# Altium PCB PCB_Hearth.PcbDoc
Units mm, origin at the board's own origin, x right, y up, seen from the top; angles counter-clockwise.
Board outline 70.36 x 62.48 mm, 2 copper layers (Top Layer, Bottom Layer); 15 components, 16 nets, 65 pads, 0 vias.
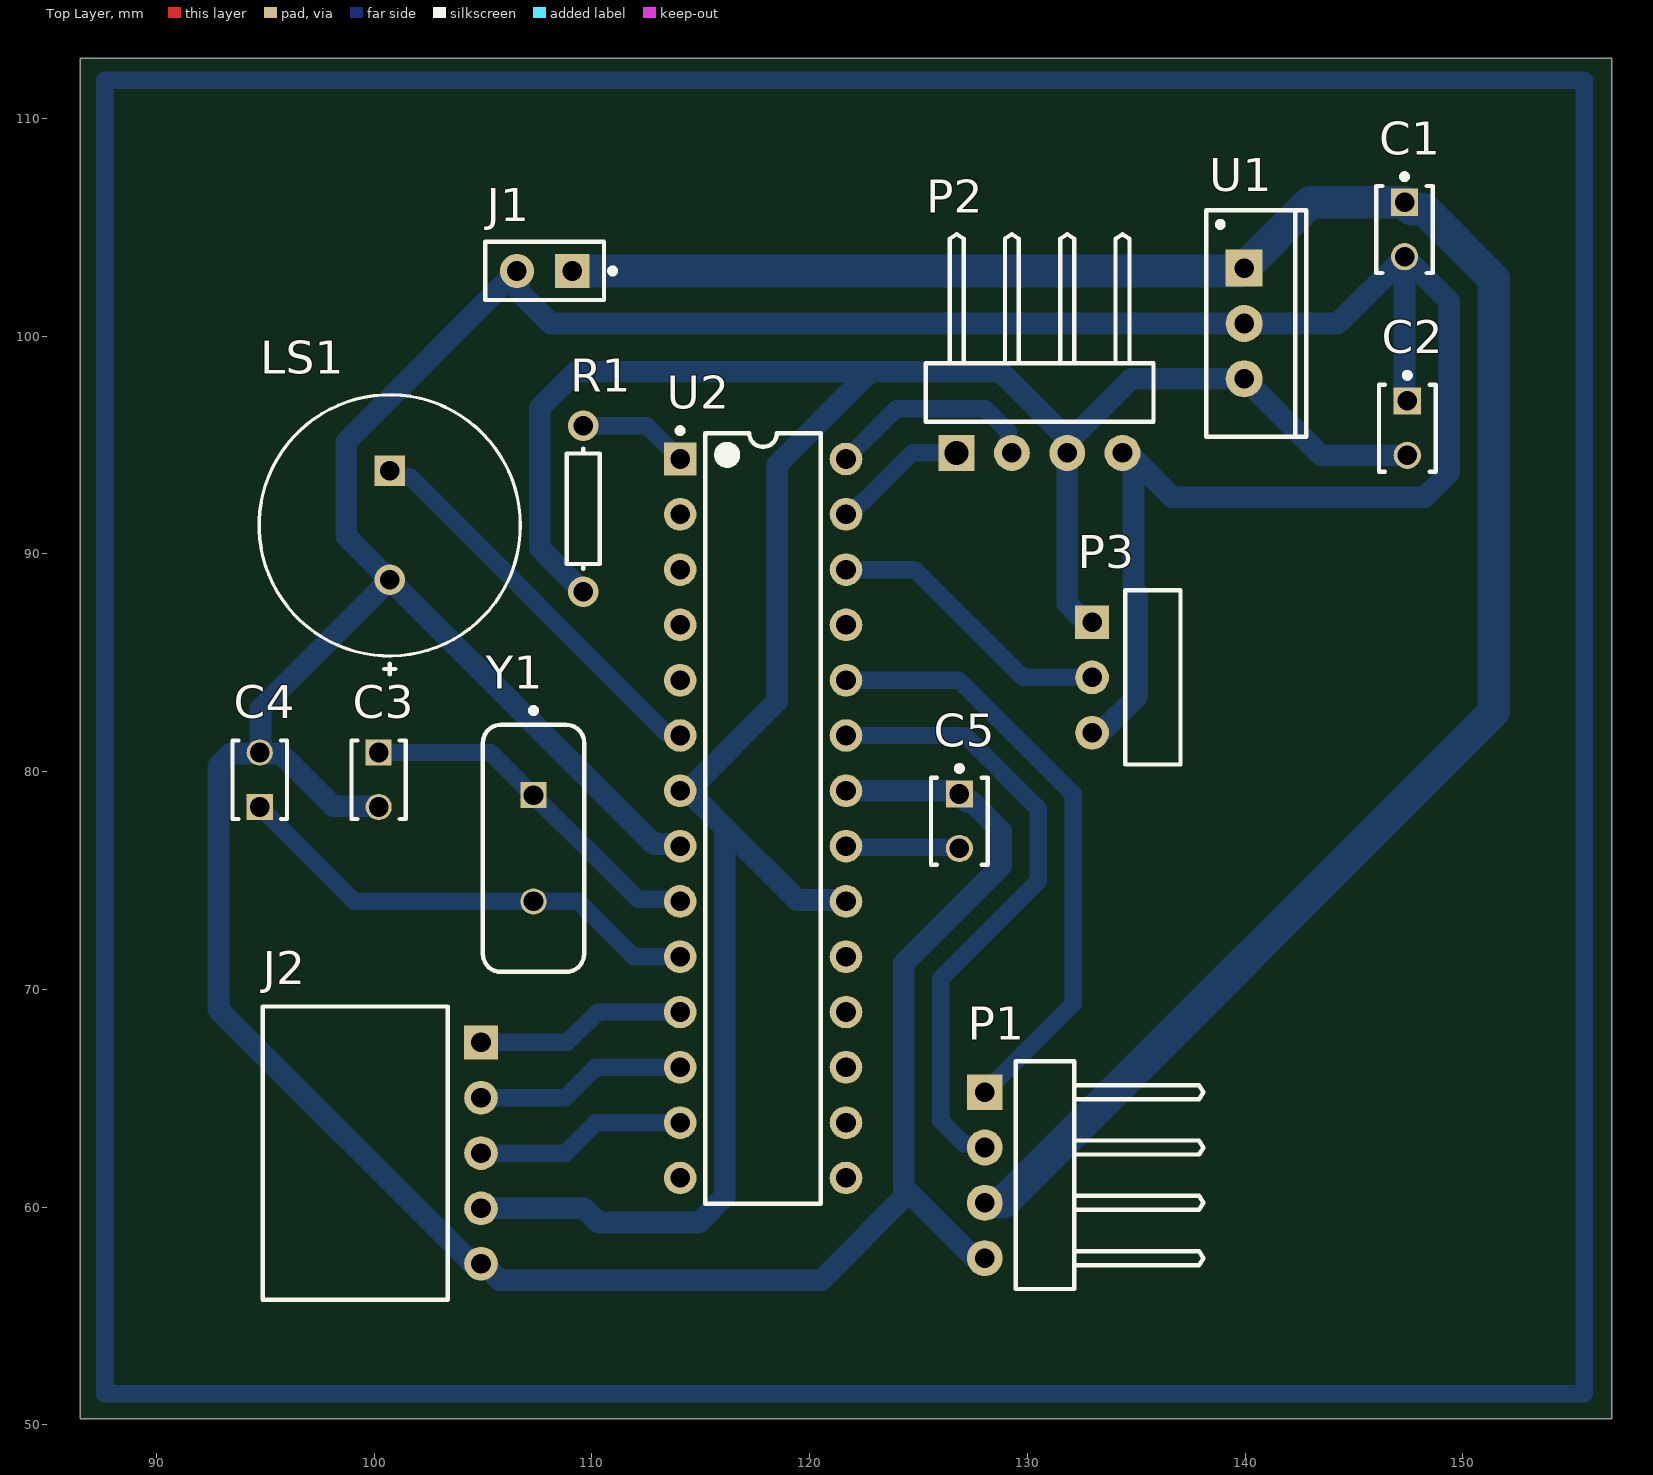
[diagram p0: Top Layer view]
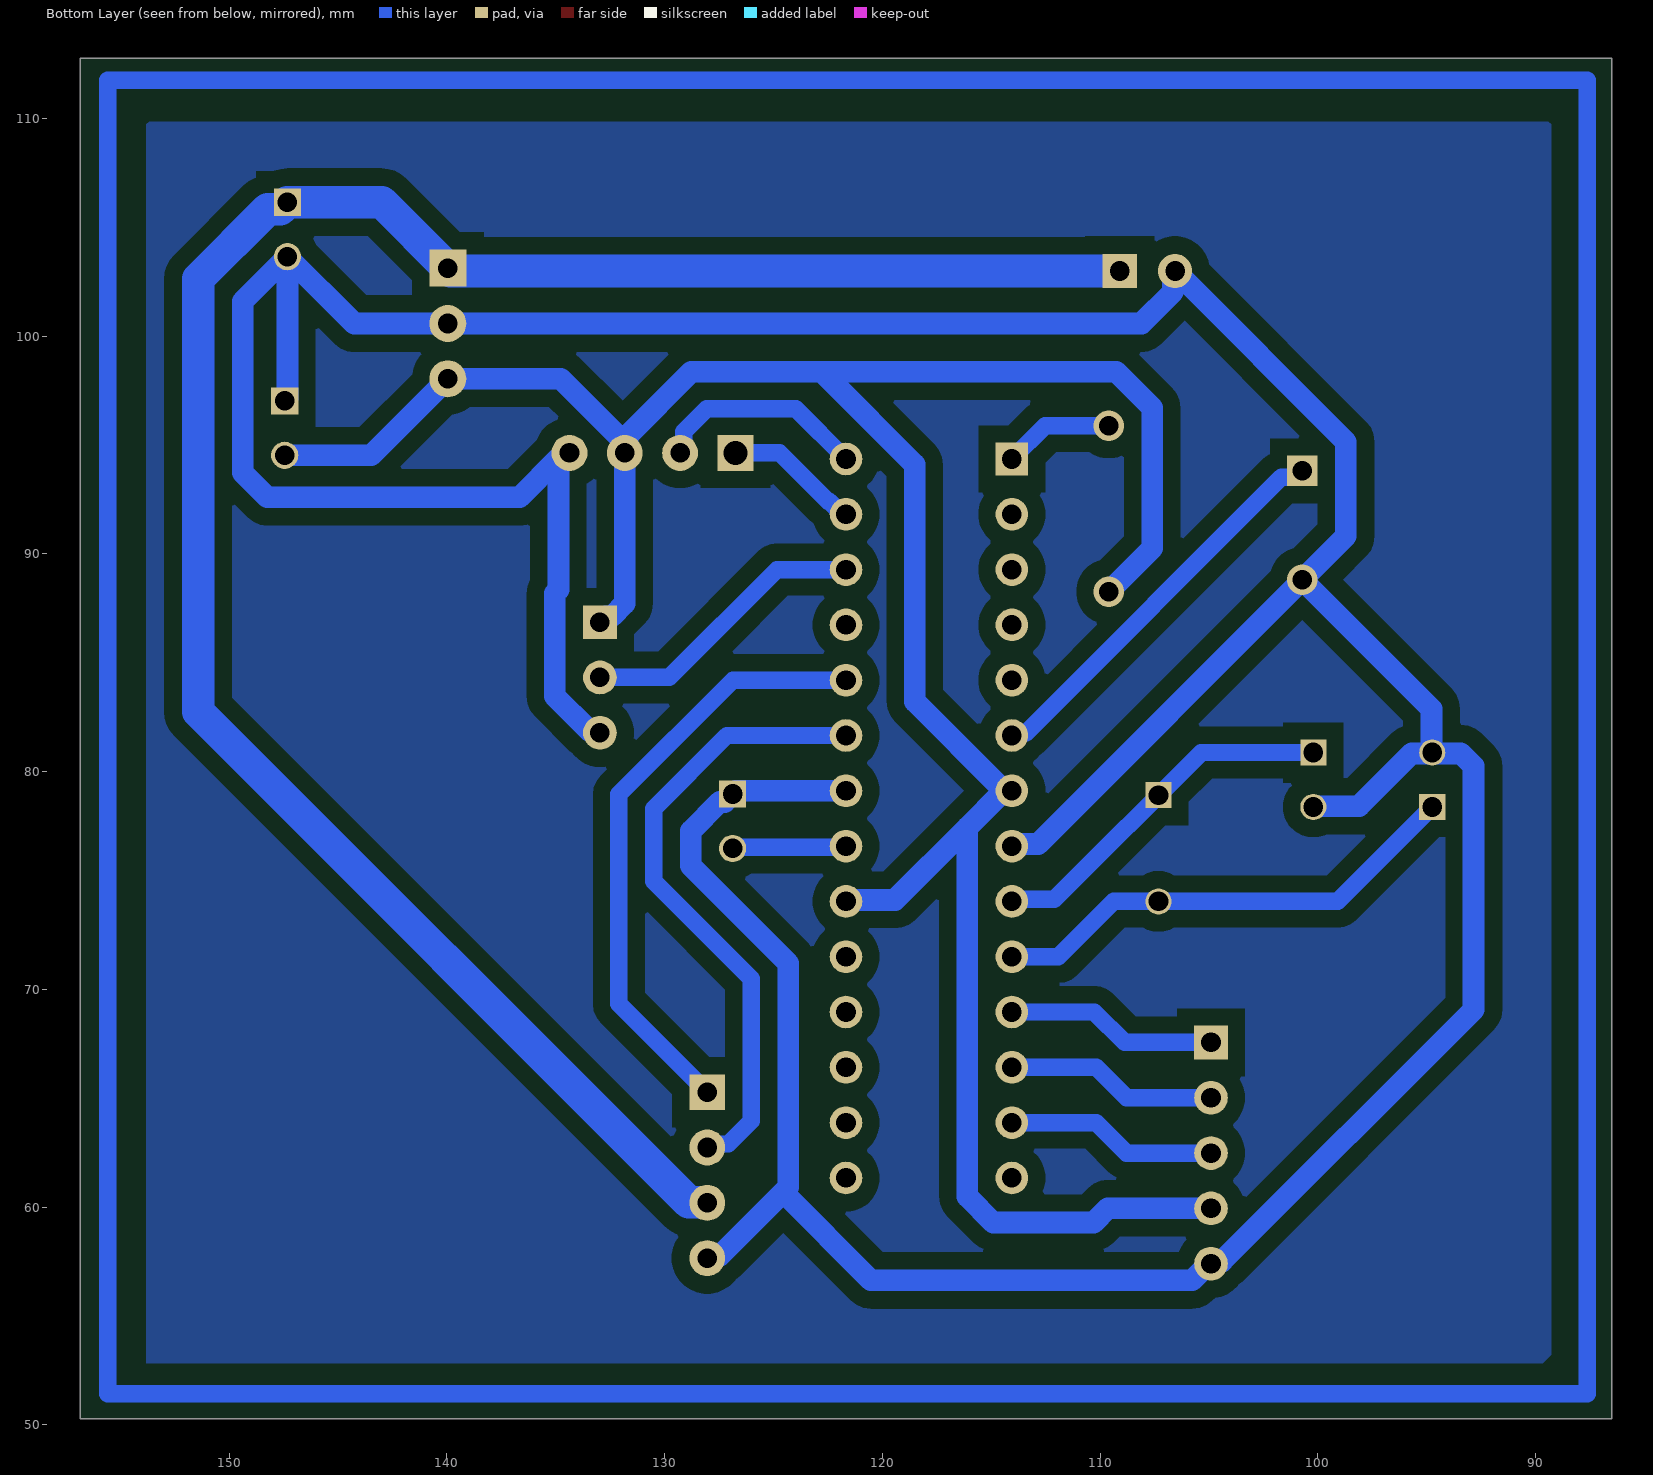
[diagram p1: Bottom Layer view, seen from below]
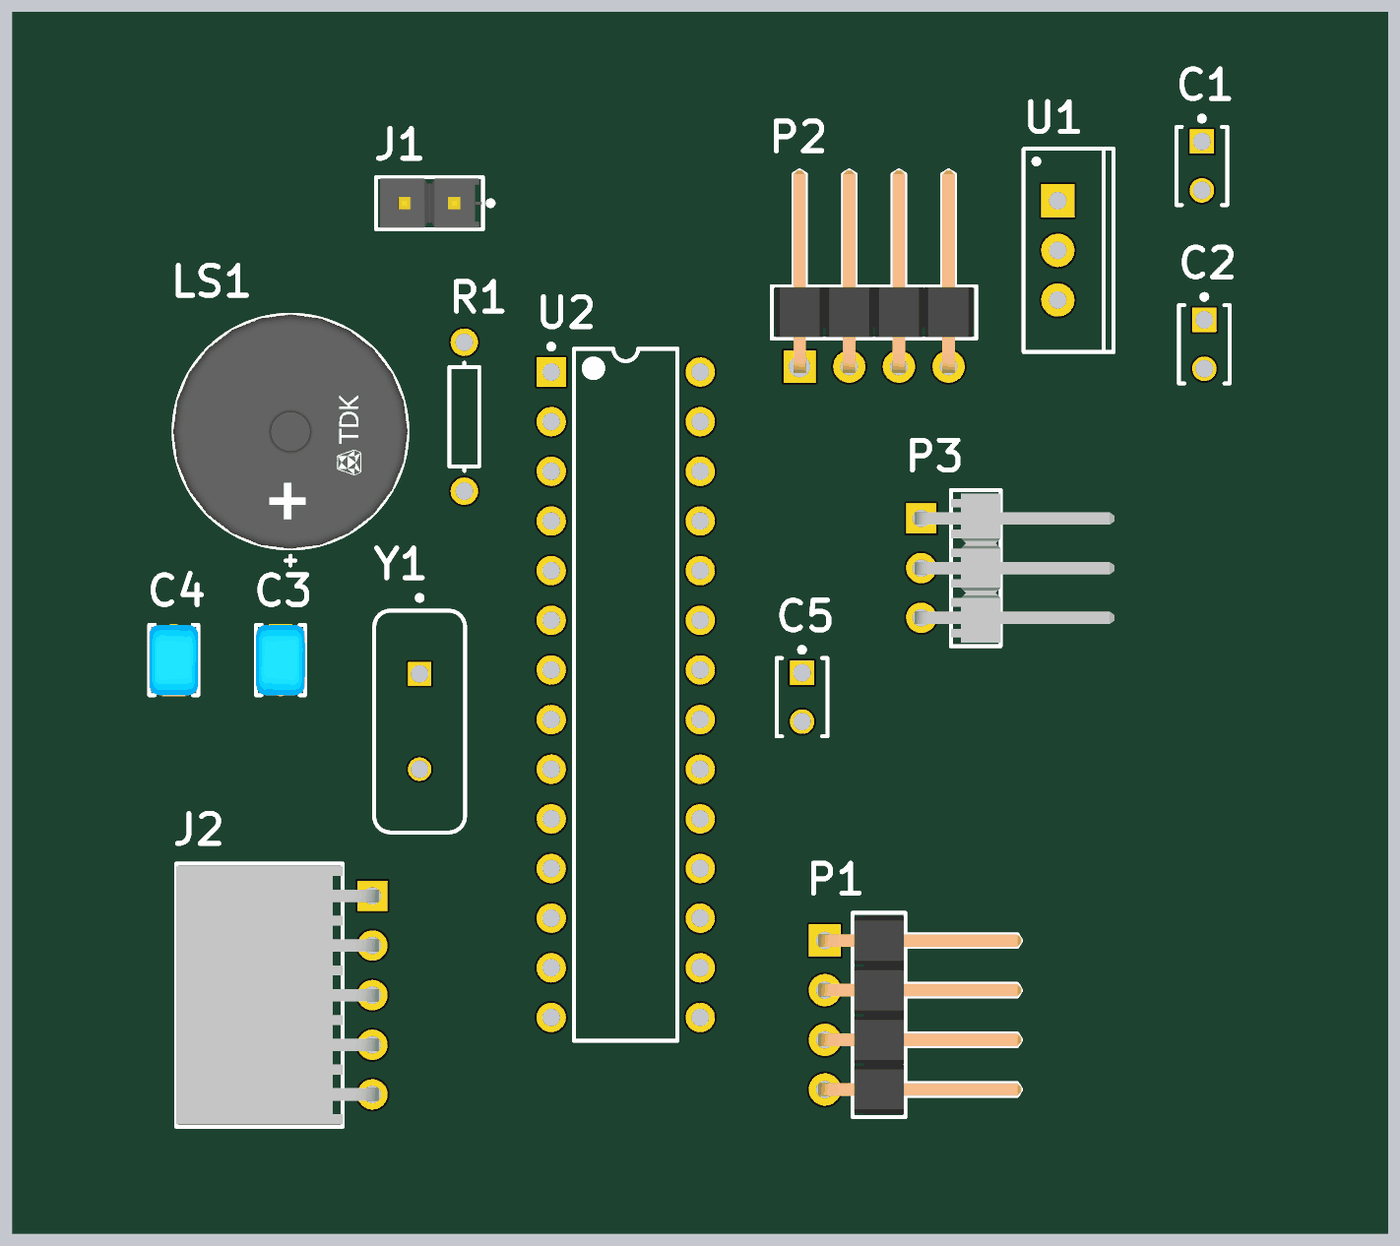
[diagram p2: 3D render of the assembled board from above, using the file's embedded part models]

## Layer stack, top to bottom
Top Solder: solder mask 0.0102, Solder Resist, Dk 3.5
Top Layer: signal copper 0.0356
Dielectric 1: dielectric 0.32, FR-4, Dk 4.8
Bottom Layer: signal copper 0.0356
Bottom Solder: solder mask 0.0102, Solder Resist, Dk 3.5

## Board outline
86.487,50.292 156.845,50.292 156.845,112.776 86.487,112.776

## Design rules (kind name [scope] priority, off if disabled: settings)
AssemblyTestPointUsage [All] p1 off:
AssemblyTestpoint [All] p1 off: testpointundercomponent=TRUE minsize=1.016 maxsize=2.54 preferedsize=1.524 minholesize=0 maxholesize=1.016 preferedholesize=0.813 testpointgrid=0.025 usegrid=TRUE gridtolerance=0 allowsidetop=TRUE allowsidebottom=TRUE
Clearance [All] p1: gap=0.8 ignorepadtopadclearanceinfootprint=FALSE
FabricationTestPointUsage [All] p1 off: valid=0 allowmultiple=FALSE
FabricationTestpoint [All] p1 off: side=3 testpointundercomponent=TRUE minsize=1.016 maxsize=2.54 preferedsize=1.524 minholesize=0 maxholesize=1.016 preferedholesize=0.813 testpointgrid=0.025 allowsidetop=TRUE allowsidebottom=TRUE usegrid=TRUE gridtolerance=0
PolygonConnect [All] p1: connectstyle=Relief reliefconductorwidth=0.254 reliefentries=4 polygonreliefangle="90 Angle" airgapwidth=0.254
RoutingVias [All] p1: holewidth=0.711 width=1.27 viastyle="Through Hole" minholewidth=0.711 minwidth=1.27 maxholewidth=0.711 maxwidth=1.27
SolderMaskExpansion [All] p1: expansion=0.102 istentingtop=FALSE
Width Width_1 [InNet('+5') or InNet('GND')] p1: maxlimit=1 minlimit=1 preferedwidth=1
Width Width_12 [InNet('VCC')] p2: maxlimit=1.5 minlimit=1.5 preferedwidth=1.5
Width [All] p3: maxlimit=1.5 minlimit=0.8 preferedwidth=0.8
26 further rules are at their usual default settings.

## Components (designator, comment, footprint, x,y, rotation, side; value= is the part's Value field where it differs from the comment)
C1 "K104K15X7RF5TL2" VISH-K104K15X7RF5TL2 147.32,104.902 r270 top
C2 "K104K15X7RF5TL2" VISH-K104K15X7RF5TL2 147.447,95.778 r270 top
C3 "RCE5C1H220J0DBH03A" FP-RCE0DB-MFG 100.203,79.629 r270 top
C4 "RCE5C1H220J0DBH03A" FP-RCE0DB-MFG 94.742,79.629 r90 top
C5 "K104K15X7RF5TL2" VISH-K104K15X7RF5TL2 126.873,77.724 r270 top
J1 "TSW-102-07-L-S" FP-TSW-102-07-L-S-MFG 107.823,102.997 r180 top
J2 "SSQ-105-02-L-S-RA" SMTC-SSQ-105-02-X-S-RA 104.902,67.564 r270 top
LS1 "SD1209T5-A1" FP-SD1209-MFG 100.711,91.313 r270 top
P1 "61300411021" 61300411021#1 130.81,61.468 r90 top
P2 "61300411021" 61300411021#2 130.556,97.409 r180 top
P3 "MTSW-103-08-L-S-229-RA" SMTC-MTSW-103-08-X-S-229-RA 132.969,86.868 r270 top
R1 "Res1" AXIAL-0.3 109.601,92.075 r270 top value=10K
U1 "L7805CV" TO220 139.954,100.584 r270 top
U2 "ATmega328-PU" 28P3 117.856,77.851 r0 top
Y1 "FOXSLF/160-20" FOX-FOXSLF160-20 107.315,76.481 r270 top

## Footprints (in the part's own frame and the unit in brackets; to place one, negate y for a bottom-side part, rotate by r counter-clockwise, add the part's x,y. Pads: shape width x height; smd on the part's side, far side on the other; paste and mask are expansions set on the pad)
28P3 [mm] "28-Pin Plastic Dual In-Line Package (PDIP)"
  rect 1.5x1.5 hole 0.9: 1(-3.81,16.51)
  round 1.5 hole 0.9: 2(-3.81,13.97) 3(-3.81,11.43) 4(-3.81,8.89) 5(-3.81,6.35) 6(-3.81,3.81) 7(-3.81,1.27) 8(-3.81,-1.27) 9(-3.81,-3.81) 10(-3.81,-6.35) 11(-3.81,-8.89) 12(-3.81,-11.43) 13(-3.81,-13.97) 14(-3.81,-16.51) 15(3.81,-16.51) 16(3.81,-13.97) 17(3.81,-11.43) 18(3.81,-8.89) 19(3.81,-6.35) 20(3.81,-3.81) 21(3.81,-1.27) 22(3.81,1.27) 23(3.81,3.81) 24(3.81,6.35) 25(3.81,8.89) 26(3.81,11.43) 27(3.81,13.97) 28(3.81,16.51)
  silkscreen extent -3.93,-17.7 2.65,17.93, body extent -3.6,-17.65 3.6,17.65, height 4.58
61300411021#1 [mm] "Pin Header, pitch 2.54 mm, THT, Angled, single row, 4p"
  rect 1.65x1.65 hole 0.9: 1(3.81,2.77)
  round 1.65 hole 0.9: 2(1.27,2.77) 3(-1.27,2.77) 4(-3.81,2.77)
  silkscreen extent -5.23,-7.27 5.23,1.35, body extent -5.08,-7.27 5.08,3.09, height 2.58
61300411021#2 [mm] "Pin Header, pitch 2.54 mm, THT, Angled, single row, 4p"
  rect 1.65x1.65 hole 1.1: 1(3.81,2.77)
  round 1.65 hole 0.9: 2(1.27,2.77) 3(-1.27,2.77) 4(-3.81,2.77)
  silkscreen extent -5.23,-7.27 5.23,1.35, body extent -5.08,-7.27 5.08,3.09, height 2.58
AXIAL-0.3 [mm] "Axial Device, Thru-Hole; 2 Leads; 0.3 in Pin Spacing"
  round 1.4 hole 0.9: 1(-3.81,0) 2(3.81,0)
  silkscreen extent -2.77,-0.76 2.77,0.76
FOX-FOXSLF160-20 [mm] "THD, 2-Leads, Body 11.35x4.65mm"
  rect 1.2x1.2 hole 0.9: 1(-2.44,0)
  round 1.2 hole 0.9: 2(2.44,0)
  silkscreen extent -6.45,-2.32 5.68,2.32, body extent -5.67,-2.32 5.68,2.33, height 3.6
FP-RCE0DB-MFG [mm]
  rect 1.2x1.2 hole 0.9 paste-1000 mask+0: 1(-1.25,0)
  round 1.2 hole 0.9 paste-1000 mask+0: 2(1.25,0)
  silkscreen extent -1.8,-1.25 1.8,1.25, body extent -1.95,-1.35 1.95,1.35, height 0.25
FP-SD1209-MFG [mm]
  rect 1.4x1.4 hole 0.9 paste-1000 mask+0: 1(-2.5,0)
  round 1.4 hole 0.9 paste-1000 mask+0: 2(2.5,0)
  silkscreen extent -6,-6 6.85,6, body extent -6.1,-6.1 6.1,6.1, height 0.25
FP-TSW-102-07-L-S-MFG [mm]
  rect 1.57x1.57 hole 0.9 paste-1000 mask+0: 1(-1.27,0)
  round 1.57 hole 0.9 paste-1000 mask+0: 2(1.27,0)
  silkscreen extent -3.25,-1.34 2.73,1.34, body extent -2.83,-1.44 2.83,1.44, height 0.25
SMTC-MTSW-103-08-X-S-229-RA [mm] "Assembly .025\" [.64] SQ Post Terminal Strip, 1x3 Pins, Right Angle, 2.54mm Pitch, Male"
  rect 1.55x1.55 hole 0.9: 1(0,0)
  round 1.55 hole 0.9: 2(2.54,0) 3(5.08,0)
  silkscreen extent -1.46,1.52 6.54,4.06, body extent -1.27,-0.32 6.35,9.88, height 3.05
SMTC-SSQ-105-02-X-S-RA [mm] "SQ Post Socket, 1x5 Pins, Right Angle, 2.54mm Pitch, Female"
  rect 1.55x1.55 hole 0.9: 1(0,0)
  round 1.55 hole 0.9: 2(2.54,0) 3(5.08,0) 4(7.62,0) 5(10.16,0)
  silkscreen extent -1.65,-10.03 11.81,-1.52, body extent -1.52,-10.03 11.68,0.32, height 2.41
TO220 [mm] "TO, Thru-Hole, Vertical, Heatsink Mounted; 3 In-Line Leads; Pitch 2.54 mm"
  rect 1.7x1.7 hole 0.9: 1(-2.54,0)
  round 1.7 hole 0.9: 2(0,0) 3(2.54,0)
  silkscreen extent -5.2,-1.75 5.2,2.85, body extent -5.25,-1.8 5.25,2.9, height 19.7
VISH-K104K15X7RF5TL2 [mm] "THD, 2-Leads, Body 4x2.6mm"
  rect 1.25x1.25 hole 0.9: 1(-1.25,0)
  round 1.25 hole 0.9: 2(1.25,0)
  silkscreen extent -2.55,-1.3 2,1.3, body extent -2,-1.3 2,1.3, height 5.6

## Part data
C1 C2 C5: library part CMP-2000-06508-1, "Ceramic Capacitor, 100 nF, +/- 10%, 50 V, -55 to 125 degC, 2-Pin THD, RoHS, Tape and Reel", Capacitance=0.1µF, Manufacturer=Vishay, Operating Temperature=-55°C~125°C, Package / Case=Radial, Package Description="2-Pin Through Hole Device, Body 4 x 2.6 mm", Ratings=-, Standard Package=1, Temperature Coefficient=X7R, Tolerance=±10%, Voltage - Rated=50V, Applications=GeneralPurpose, Catalog Drawings=Mono-KapSide2-15_5.58Mono-KapSide1_15, Category=Capacitors, Datasheet URL=http://www.vishay.com/docs/45171/kseries.pdf, Datasheet Version=08/2013, Family=CeramicCapacitors, Features=-, Height - Seated (Max)="0.220\"(5.58mm)", Lead Spacing="0.098\"(2.50mm)", Lead Style=Straight, Manufacturer URL=http://www.vishay.com/, Mounting Technology=ThroughHole, Mounting Type=ThroughHole, Online Catalog=Mono-Kap™Series, Other Names=BC1084CT, Package Reference=K104K15X7RF5TL2, Packaging=CutTape(CT), Series=Mono-Kap™K, Size / Dimension="0.157\"Lx0.098\"W(4.00mmx2.50mm)", Thickness (Max)=-
C3 C4: library part CMP-06035-057691-1, "Cap Ceramic 22pF 50V C0G ±5% Radial 2.5mm +125°C Ammo Pack", Capacitance=22pF, Case/Package=Radial, Dielectric=C0G, Max Operating Temperature=125°C, Min Operating Temperature=-55°C, Package Quantity=2000, Ratings=AEC-Q200, Resistor Type=Ceramic, Tolerance=5%, Voltage Rating=50V, Height=3.5mm, Height - Seated (Max)=0.138inch, Lead Diameter=0.5mm, Lead Pitch=0.098inch, Lead/Base Style=Straight, Length=0.142inch, Mount="Through Hole", Packaging="Tape and Reel", Termination=Radial, Voltage Rating (DC)=50V, Width=0.098inch
J1: library part CMP-02766-001428-1, "CONN HEADER VERT 2POS 2.54MM", Color=Black, Current Rating=7.6A, Max Operating Temperature=125°C, Max Voltage Rating (AC)=550V, Min Operating Temperature=-55°C, Package Quantity=1, Connector Type="Male Pin", Contact Material=Bronze, Contact Mating Length=0.23inch, Contact Plating=Gold, Contact Type="Male Pin", Depth=2.54mm, Gender=Male, Housing Color=Black, Housing Material=Polyester, Lead Free="Lead Free", Length=5.08mm, Max Current Rating=7.6A, Mount="Through Hole", Number of Contacts=2, Number of Positions=2, Number of Rows=1, Orientation=Straight, Packaging=Bulk, Pitch=2.54mm, Radiation Hardening=No, REACH SVHC="No SVHC", RoHS Compliant=Yes, Series=TSW, Termination=Solder, Voltage Rating=550V, Width=2.54mm
J2: library part CMP-1023-00283-1, "SQ Post Socket, Through-hole, Right Angle, -55 to 125 degC, 2.54 mm Pitch, 5-Pin, Female, RoHS", Manufacturer=Samtec, Temperature Range="-55 to 125 degC", ComponentLink1Description="Manufacturer URL", ComponentLink1URL=http://www.samtec.com, ComponentLink2Description=Datasheet, ComponentLink2URL=http://www.samtec.com/documents/webfiles/pdf/SSQ_TH.PDF, ComponentLink3Description="Package Specification", ComponentLink3URL=http://www.samtec.com/documents/webfiles/cpdf/SSQ-1XX-XX-XXX-X-XX-XXX-XX-X-MKT.pdf, DatasheetVersion=F-214, Mounting Technology=Through-hole, Orientation="Right Angle", PackageDescription="Assembly, Socket Strip .025[0.64] SQ Tail", PackageReference=SSQ-105-02-X-S-RA, PackageVersion="BD, 6/1987", PartNumber=SSQ-105-02-L-S-RA, Pitch="2.54 mm", RoHS=True
LS1: library part CMP-08413-000009-1, "AUDIO MAGNETIC XDCR 3-6V TH", Current Rating=60mA, Frequency=2.048kHz, Max Operating Temperature=85°C, Min Operating Temperature=-40°C, Operating Supply Voltage=5V, Package Quantity=100, Self Resonant Frequency=2.05kHz, Diameter=12mm, Height=9mm, Lead Free="Lead Free", Max Supply Current=60mA, Mount="Through Hole", Number of Pins=2, Number of Terminals/Pins=2, Operating Supply Current=60mA, Packaging=Tray, Sensing Method=Magnetic, Series=SD, Termination="PC Pins", Voltage Rating (DC)=5V, Washable=No
P1 P2: library part CMP-1502-01063-1, "THT Angled Pin Header WR-PHD, Pitch 2.54 mm, Single Row, 4 pins", Contact Resistance=20mOhm, Manufacturer="Wurth Elektronik", Operating Temperature=-40to105degC, Rated Current=3A, Withstanding Voltage=500VAC, Working Voltage=250VAC, Datasheet URL=https://katalog.we-online.de/em/datasheet/6130xx11021.pdf, Gender=Male, Manufacturer URL=http://www.we-online.de, Mounting Technology=THT, Orientation=Angled, Package Reference=61300411021, Packaging=Bag, Part Number=61300411021, Pin Number=4, Pitch=2.54mm, Publisher=WurthElektronik, Row Number=Single
P3: library part CMP-1024-00103-1, "Modified .025\" SQ Post Header, Through-hole, Right Angle, -55 to 125 degC, 2.54 mm Pitch, 3-Pin, Male, RoHS", Manufacturer=Samtec, Temperature Range="-55 to 125 degC", ComponentLink1Description="Manufacturer URL", ComponentLink1URL=http://www.samtec.com, ComponentLink2Description=Datasheet, ComponentLink2URL=http://www.samtec.com/documents/webfiles/pdf/MTSW.PDF, ComponentLink3Description="Package Specification", ComponentLink3URL=http://www.samtec.com/documents/webfiles/cpdf/MTSW-XXX-XX-X-X-XXXX-XX-XXX-MKT1.pdf, DatasheetVersion=F-214, Mounting Technology=Through-hole, Orientation="Right Angle", PackageDescription="Assembly .025\" [.64] SQ Post Terminal Strip", PackageReference=MTSW-103-08-X-S-229-RA, PackageVersion="BI, 2/1987", PartNumber=MTSW-103-08-L-S-229-RA, Pitch="2.54 mm", RoHS=True
R1: "Resistor", LatestRevisionDate=17-Jul-2002, LatestRevisionNote="Re-released for DXP Platform.", PackageDescription="Axial Device, Thru-Hole; 2 Leads; 0.3 in Pin Spacing", PackageReference=AXIAL-0.3, Published=8-Jun-2000, Publisher="Altium Limited"
U1: library part CMP-0244-00483-1, "Positive Voltage Regulator, 5V, 3-Pin TO-220", ComponentLink1Description="Manufacturer URL", ComponentLink1URL=http://www.st.com, ComponentLink2Description=Datasheet, ComponentLink2URL=http://www.st.com/internet/com/TECHNICAL_RESOURCES/TECHNICAL_LITERATURE/DATASHEET/CD00000444.pdf, ComponentLink3Description="Package Specification", ComponentLink3URL=http://www.st.com/internet/com/TECHNICAL_RESOURCES/TECHNICAL_LITERATURE/PACKAGE_INFORMATION/CD00004649.pdf, DatasheetVersion=16/11/2011, PackageDescription="TO, Thru-Hole, Vertical, Heatsink Mounted; 3 In-Line Leads; Pitch 2.54 mm", PackageReference=TO220, PackageVersion=ver3.0
U2: library part CMP-0095-00015-2, "8-bit AVR Microcontroller, 32KB Flash, 1KB EEPROM, 2KB SRAM, 28-pin PDIP, Industrial Grade (-40°C to 85°C)", ComponentLink1Description="Manufacturer URL", ComponentLink1URL=http://www.atmel.com/, ComponentLink2Description="ATmega48A/48PA/88A/88PA/168A/168PA/328/328P Datasheet", ComponentLink2URL=http://www.atmel.com/dyn/resources/prod_documents/8271.pdf, ComponentLink3Description="ATmega48A/48PA/88A/88PA/168A/168PA/328/328P Summary", ComponentLink3URL=http://www.atmel.com/dyn/resources/prod_documents/8271S.pdf, DatasheetVersion="revD, May-2011", PackageDescription="28-lead (0.300\"/7.62mm Wide) Plastic Dual Inline Package (PDIP)", PackageReference=28P3, PackageVersion="revB, Sep-2001", RevisionNote="DatasheetVersion updated. URLs added."
Y1: library part CMP-1749-00003-1, "Resistance Weld Thru-Hole Crystal, 16 MHz, -20 to 70 degC, 2-Pin THD, RoHS, Bulk", Case\Package=Axial, Max Operating Temperature="155 degC", Min Operating Temperature="-55 degC", Package Quantity=200, Power Rating="250 mW", Resistance="221 kohm", Tolerance=1%, Voltage Rating="250 V", ComponentLink1Description="Manufacturer URL", ComponentLink1URL=http://www.foxonline.com/, ComponentLink2Description=Datasheet, ComponentLink2URL=http://www.foxonline.com/pdfs/hc49slf.pdf, DatasheetVersion=Mar-15, Length="0.248 inch", Mount="Through Hole", PackageDescription="2-Pin Through Hole Device, Body 11.35 x 4.65 mm", PackageReference=FOXSLF160-20, Packaging=Bulk, RoHSCompliant=true

## Nets (pads, with @x,y where several pads share a name; then routed paths per layer and width w, separated by ;. In a path a pad name is that pad's centre, name@x,y a point inside that pad or via, vN(x,y) a via of type N, cw(c..) or ccw(c..) an arc to the next point about the centre after c; other vN are vias at no path point)
+5: C2.2 J2.4 P2.3 P3.1 R1.2 U1.3 U2.7 U2.20 | length 124.3
  Bottom Layer w1: J2.4 109.646,59.944 110.299,59.291 114.895,59.291 116.096,60.492 116.096,77.43 ; R1.2 107.601,90.265 107.601,96.713 109.252,98.364 122.77,98.364 ; U2.20@121.57,73.945 U2.20 121.597,74.11 119.416,74.11 116.096,77.43 ; P2.3@132.08,95.358 134.766,98.044 U1.3 143.47,94.528 C2.2 ; P3.1 132.694,87.143 132.412,87.143 131.826,87.729 P2.3 131.702,94.763 131.702,95.435 128.772,98.364 122.77,98.364 ; 116.096,77.43 114.501,79.025 114.142,79.025 U2.7 114.142,79.217 114.501,79.217 118.508,83.224 118.508,94.102 122.516,98.11 122.77,98.364
GND: C1.2 C2.1 C3.2 C4.2 C5.1 J1.2 J2.5 LS1.2 P1.4 P2.4 P3.3 U1.2 U2.8 U2.22 | length 227.1
  Bottom Layer w1: C3.2 100.165,78.417 98.111,78.417 95.687,80.841 94.78,80.841 C4.2 ; U2.8 113.95,76.677 112.847,76.677 LS1.2 ; U2.22 C5.1@126.726,79.121 ; 124.557,60.676 120.523,56.642 105.763,56.642 105.001,57.404 J2.5 104.797,57.509 104.402,57.509 92.842,69.07 92.842,80.255 93.428,80.841 94.704,80.841 C4.2 ; C5.1@126.748,79.099 127.234,78.613 127.456,78.613 128.798,77.271 128.798,75.677 124.315,71.194 124.315,60.918 127.45,57.782 127.916,57.782 P1.4 ; P3.3 133.074,81.893 133.469,81.893 135.044,83.469 135.044,88.181 134.874,88.351 134.874,94.385 136.656,92.603 148.244,92.603 149.372,93.731 149.372,101.6 C1.2 ; C2.1 147.32,97.155 C1.2 ; C4.2 94.78,80.917 94.78,82.882 LS1.2 ; LS1.2 98.711,90.813 98.711,95.155 J1.2 106.662,102.888 106.662,102.019 108.098,100.584 U1.2 144.252,100.584 C1.2
NetC3_1: C3.1 U2.9 Y1.1 | length 16.7
  Bottom Layer w0.8: C3.1 105.357,80.879 112.096,74.14 113.947,74.14 U2.9
NetC4_1: C4.1 U2.10 Y1.2 | length 22.2
  Bottom Layer w0.8: C4.1 99.08,74.041 Y1.2 109.37,74.041 111.91,71.501 U2.10
NetC5_2: C5.2 U2.21 | length 5.3
  Bottom Layer w0.8: U2.21 121.72,76.527 126.819,76.527 C5.2
NetJ2_1: J2.1 U2.11 | length 9.7
  Bottom Layer w0.8: J2.1 108.868,67.564 110.265,68.961 U2.11
NetJ2_2: J2.2 U2.12 | length 9.7
  Bottom Layer w0.8: J2.2 108.782,65.024 110.179,66.421 U2.12
NetJ2_3: J2.3 U2.13 | length 9.7
  Bottom Layer w0.8: J2.3 108.782,62.484 110.179,63.881 U2.13
NetLS1_1: LS1.1 U2.6 | length 18.4
  Bottom Layer w0.8: LS1.1 101.011,93.513 101.666,93.513 113.384,81.795 113.912,81.795 U2.6
NetP1_1: P1.1 U2.24 | length 28
  Bottom Layer w0.8: U2.24 126.856,84.201 132.098,78.959 132.098,69.336 P1.1
NetP1_2: P1.2 U2.23 | length 29
  Bottom Layer w0.8: U2.23 127.133,81.661 130.498,78.296 130.498,74.972 126.015,70.489 126.015,63.956 127.07,62.901 127.877,62.901 P1.2
NetP2_1: P2.1 U2.27 | length 6.2
  Bottom Layer w0.8: U2.27 121.855,91.821 122.445,92.411 122.493,92.411 124.721,94.639 P2.1
NetP2_2: P2.2 U2.28 | length 9.9
  Bottom Layer w0.8: U2.28 123.969,96.664 128.068,96.664 129.123,95.609 129.123,94.802 P2.2
NetP3_2: P3.2 U2.26 | length 13.4
  Bottom Layer w0.8: U2.26 124.834,89.281 129.787,84.328 P3.2
NetR1_1: R1.1 U2.1 | length 5.1
  Bottom Layer w0.8: R1.1 112.522,95.885 U2.1
VCC: C1.1 J1.1 P1.3 U1.1 | length 97.7
  Bottom Layer w1.5: J1.1 139.827,102.997 U1.1 142.982,106.152 C1.1 147.645,105.827 148.221,105.827 151.422,102.626 151.422,82.761 128.887,60.227 128.069,60.227 P1.3
pads on no net: U2.2 U2.3 U2.4 U2.5 U2.14 U2.15 U2.16 U2.17 U2.18 U2.19 U2.25
copper on no net: | length 256.5
  Bottom Layer w0.8: 87.63,51.435 155.575,51.435 155.575,111.76 87.63,111.76 87.63,51.435

## Polygon pours and split planes (outlines as drawn)
no net on Bottom Layer "NONET_L02_P001" (solid, pour order 1): 89.408,109.855 153.67,109.855 153.797,109.728 153.797,52.832 89.662,52.832 89.281,53.213 89.281,109.728